# EAGLE board 01-main (EAGLE 9.6.2)
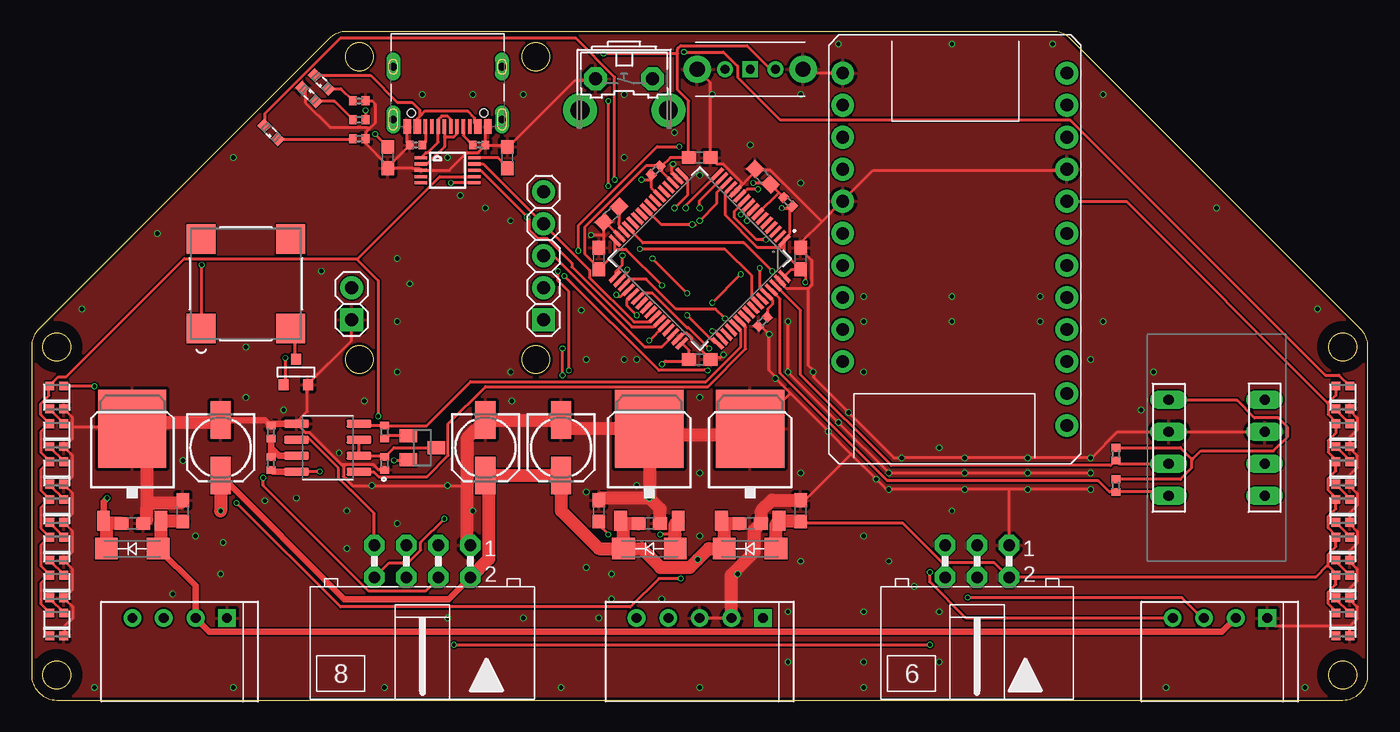
[diagram p0: board, top side]
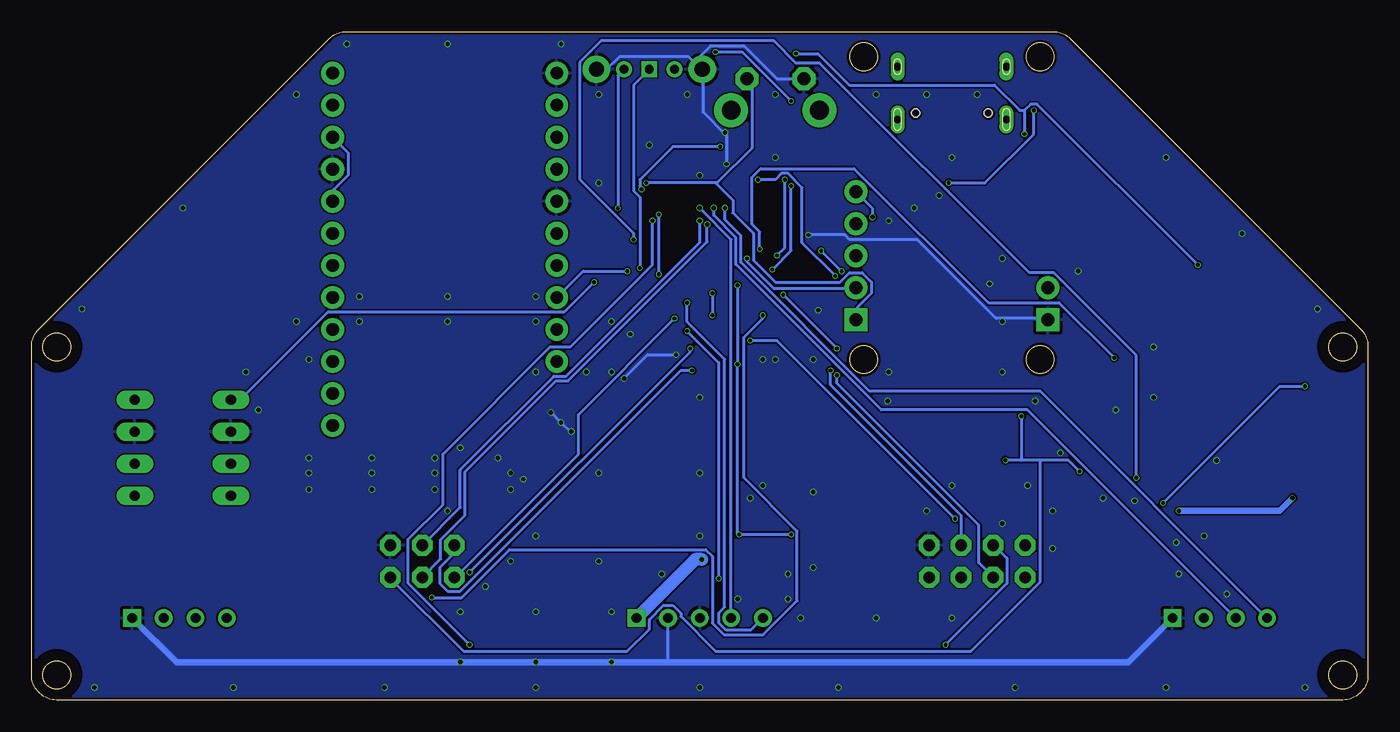
[diagram p1: board, bottom side, seen from below]

Size 106 x 53 mm. Coordinates in mm from the lower left corner, seen from the top.
Outline: 82.41,52.41 arc45 81,53 25,53 arc45 23.59,52.41 0.59,29.41 arc45 0,28 0,2 arc90 2,0 104,0 arc90 106,2 106,28 arc45 105.41,29.41 82.41,52.41
Outline: circle at 104,2 radius 1.1
Outline: circle at 2,28 radius 1.1
Outline: circle at 2,2 radius 1.1
Outline: circle at 104,28 radius 1.1
Outline: circle at 26,27 radius 1.1
Outline: circle at 40,27 radius 1.1
Outline: circle at 40,51 radius 1.1
Outline: circle at 26,51 radius 1.1
Copper layers (1*16): Top 0.035mm / dielectric 1.6mm / Bottom 0.035mm
Design rules "jlcpcb-2layers *": minimum track width 5mil, minimum drill 0.3mm, track to track 5mil, track to pad 5mil, pad to pad 5mil, via to via 5mil, smd to smd 5mil, copper to edge 0.2mm, drill to drill 6mil, minimum pad ring 10mil, minimum via ring 3mil, stop-mask expansion 4mil, vias tented up to drill 15mil, thermal gap 10mil
Net classes: 0 default: width 0.254 mm
tRestrict: area 102,26 to 106,30; area 0,0 to 4,4; area 102,0 to 106,4; area 0,26 to 4,30
bRestrict: area 102,26 to 106,30; area 0,0 to 4,4; area 102,0 to 106,4; area 0,26 to 4,30

## Footprints (pad centres in the part's own frame; a part is rotated, then mirrored left to right if it is on the bottom)
C0603 = smd 1.1 x 1: 1 -0.85,0; 2 0.85,0
153CLV-0505 = smd 3 x 1.6: + 2.2,0; - -2.2,0
ML6L = drill 0.914 octagon: 1 -3.81,-1.27; 2 -3.81,1.27; 3 -1.27,-1.27; 4 -1.27,1.27; 5 1.27,-1.27; 6 1.27,1.27; 7 3.81,-1.27; 8 3.81,1.27
SMA-DO214AC = smd 1.8 x 1.7: A -2.05,0; K 2.05,0
CON_22057045_MOL = drill 0.787 pad 1.143 square: 1 0,0 | drill 0.787 pad 1.143: 2 -2.489,0; 3 -5.004,0; 4 -7.493,0
CON_22057055_MOL = drill 0.787 pad 1.143 square: 1 0,0 | drill 0.787 pad 1.143: 2 -2.489,0; 3 -5.004,0; 4 -7.493,0; 5 -10.008,0
1X02 = drill 1.016 square: 1 -1.27,0 | drill 1.016: 2 1.27,0
1X05 = drill 1.016 square: 1 -5.08,0 | drill 1.016: 2 -2.54,0; 3 0,0; 4 2.54,0; 5 5.08,0
WS2812B_2020 = smd 0.7 x 0.7: 1 0.9,-0.55; 2 0.9,0.55; 3 -0.9,0.55; 4 -0.9,-0.55
SML0603 = smd 0.8 x 0.8: A 0.75,0; C -0.75,0
MLT-8530_JHE = smd 2.311 x 2.311: 1 -3.55,3.55; 2 -3.55,-3.55; 3 3.55,3.55; 4 3.55,-3.55
SOT23 = smd 1 x 1.4: 1 -0.95,-1.1; 2 0.95,-1.1; 3 0,1.1
R0402 = smd 0.6 x 0.7: 1 -0.5,0; 2 0.5,0
MYPARTS_D-PAK_TO252AA = smd 1 x 1.6: 1 -2.28,-4.8; 3 2.28,-4.8 | smd 5.4 x 6.2: 4 0,2.5
B3F-31XX = drill 1.016 octagon: 1 -2.261,-1.245; 2 2.261,-1.245 | drill 1.499 pad 2.159: 3 -3.505,1.245; 4 3.505,1.245
ML6L' = drill 0.914 octagon: 1 -2.54,-1.27; 2 -2.54,1.27; 3 0,-1.27; 4 0,1.27; 5 2.54,-1.27; 6 2.54,1.27
SK-12D11VG3 = drill 0.7 square: 1 0,0 | drill 0.7: 2 -2,0; 3 2,0 | drill 1.2: 4 -4.2,0; 5 4.2,0
SOT-23 = smd 0.787 x 0.889: 1 0.025,-1.016; 2 -0.94,1.016; 3 0.991,1.016
MSOP10 = smd 1 x 0.25: 1 -2.113,1; 2 -2.113,0.5; 3 -2.113,0; 4 -2.113,-0.5; 5 -2.113,-1; 6 2.113,-1; 7 2.113,-0.5; 8 2.113,0; 9 2.113,0.5; 10 2.113,1
LQFP64-10X10MM = smd 1.194 x 0.305: 1 -5.75,3.75; 2 -5.75,3.25; 3 -5.75,2.75; 4 -5.75,2.25; 5 -5.75,1.75; 6 -5.75,1.25; 7 -5.75,0.75; 8 -5.75,0.25; 9 -5.75,-0.25; 10 -5.75,-0.75; 11 -5.75,-1.25; 12 -5.75,-1.75; 13 -5.75,-2.25; 14 -5.75,-2.75; 15 -5.75,-3.25; 16 -5.75,-3.75; 33 5.75,-3.75; 34 5.75,-3.25; 35 5.75,-2.75; 36 5.75,-2.25; 37 5.75,-1.75; 38 5.75,-1.25; 39 5.75,-0.75; 40 5.75,-0.25; 41 5.75,0.25; 42 5.75,0.75; 43 5.75,1.25; 44 5.75,1.75; 45 5.75,2.25; 46 5.75,2.75; 47 5.75,3.25; 48 5.75,3.75 | smd 0.305 x 1.194: 17 -3.75,-5.75; 18 -3.25,-5.75; 19 -2.75,-5.75; 20 -2.25,-5.75; 21 -1.75,-5.75; 22 -1.25,-5.75; 23 -0.75,-5.75; 24 -0.25,-5.75; 25 0.25,-5.75; 26 0.75,-5.75; 27 1.25,-5.75; 28 1.75,-5.75; 29 2.25,-5.75; 30 2.75,-5.75; 31 3.25,-5.75; 32 3.75,-5.75; 49 3.75,5.75; 50 3.25,5.75; 51 2.75,5.75; 52 2.25,5.75; 53 1.75,5.75; 54 1.25,5.75; 55 0.75,5.75; 56 0.25,5.75; 57 -0.25,5.75; 58 -0.75,5.75; 59 -1.25,5.75; 60 -1.75,5.75; 61 -2.25,5.75; 62 -2.75,5.75; 63 -3.25,5.75; 64 -3.75,5.75
SUNA_LIB_M5STAMPC3UMATE = drill 1: 3V3P 10.16,10.16; 5V1P -7.62,-2.54; 5V2P -7.62,-7.62; 5V3P 10.16,-10.16; ENP 10.16,2.54; G0P -7.62,-12.7; G1P -7.62,-10.16; G3P -7.62,15.24; G4P -7.62,12.7; G5P -7.62,10.16; G6P -7.62,7.62; G7P -7.62,5.08; G8P -7.62,2.54; G9P 10.16,0; G10 -7.62,0; G18P 10.16,-5.08; G19P 10.16,-7.62; G20P 10.16,5.08; G21P 10.16,7.62; GND2P -7.62,-5.08; GND3P 10.16,-12.7; GND4P 10.16,-2.54
SOCKET-08 = drill 0.813 long: 1 -3.81,-3.81; 2 -1.27,-3.81; 3 1.27,-3.81; 4 3.81,-3.81; 5 3.81,3.81; 6 1.27,3.81; 7 -1.27,3.81; 8 -3.81,3.81
SOIC127P600X175-8N = smd 1.97 x 0.59: 1 -2.475,1.905; 2 -2.475,0.635; 3 -2.475,-0.635; 4 -2.475,-1.905; 5 2.475,-1.905; 6 2.475,-0.635; 7 2.475,0.635; 8 2.475,1.905
USB_C_CUSB31-CFM2AX-01-X = smd 0.575 x 1.15: A1B12 -3.2,3.545; A4B9 -2.4,3.545; B1A12 3.2,3.545; B4A9 2.4,3.545 | smd 0.275 x 1.15: A5 -1.25,3.545; A6 -0.25,3.545; A7 0.25,3.545; A8 1.25,3.545; B5 1.75,3.545; B6 0.75,3.545; B7 -0.75,3.545; B8 -1.75,3.545 | drill 0.6 pad 1 long: M1 -4.32,2.97; M2 4.32,2.97; M3 -4.32,-1.21; M4 4.32,-1.21 | hole 0.65: 2.89,2.47; -2.89,2.47

## Placement (x,y rotation side)
C1  4.7µ  [C0603]  46,38.5 225 top
C2  0.1µ  [C0603]  53,43 0 top
C3  0.1µ  [C0603]  45,35 90 top
C4  0.1µ  [C0603]  61,35 90 top
C5  0.1µ  [C0603]  53,27 0 top
C6  0.1µ  [C0603]  28.25,43 270 top
C7  0.1µ  [C0603]  45,15 90 top
C8  1µ  [C0603]  57,14 0 top
C9  100μ  [153CLV-0505]  36,20 270 top
C11  0.1µ  [C0603]  61,15 90 top
C13  100μ  [153CLV-0505]  42,20 270 top
C14  0.1µ  [C0603]  37.75,43 90 top
C16  0.1µ  [C0603]  58,41.5 135 top
C17  1µ  [C0603]  49,14 0 top
C18  0.1µ  [C0603]  12,15 90 top
C19  1µ  [C0603]  8,14 0 top
C20  100μ  [153CLV-0505]  15,20 270 top
CN1  ML8  [ML6L]  31,11 180 top
D1  1N4001  [SMA-DO214AC]  49,12 180 top
D2  1N4001  [SMA-DO214AC]  57,12 180 top
D4  1N4001  [SMA-DO214AC]  8,12 180 top
J1  22057045  [CON_22057045_MOL]  98,6.5 0 top
J8  22057045  [CON_22057045_MOL]  15.5,6.5 0 top
J14  22057055  [CON_22057055_MOL]  58,6.5 0 top
JP1  [1X02]  25.38,31.41 90 top
JP2  [1X05]  40.62,35.22 90 top
LED1  WS2812B_2020  [WS2812B_2020]  2,24 270 top
LED2  WS2812B_2020  [WS2812B_2020]  2,21 270 top
LED3  WS2812B_2020  [WS2812B_2020]  2,18 270 top
LED4  WS2812B_2020  [WS2812B_2020]  2,15 270 top
LED5  WS2812B_2020  [WS2812B_2020]  2,12 270 top
LED6  WS2812B_2020  [WS2812B_2020]  2,9 270 top
LED7  WS2812B_2020  [WS2812B_2020]  2,6 270 top
LED8  WS2812B_2020  [WS2812B_2020]  104,24 270 top
LED9  WS2812B_2020  [WS2812B_2020]  104,21 270 top
LED10  WS2812B_2020  [WS2812B_2020]  104,18 270 top
LED11  WS2812B_2020  [WS2812B_2020]  104,15 270 top
LED12  WS2812B_2020  [WS2812B_2020]  104,12 270 top
LED13  WS2812B_2020  [WS2812B_2020]  104,9 270 top
LED14  WS2812B_2020  [WS2812B_2020]  104,6 270 top
LED15  BLUE  [SML0603]  23,49 135 top
LED17  WHITE  [SML0603]  19,45 135 top
LED18  WHITE  [SML0603]  22,48 315 top
LS1  MLT-8530  [MLT-8530_JHE]  17,33 90 top
Q1  C1015  [SOT23]  31,20 270 top
R1  5k1  [R0402]  35.5,44 0 top
R2  5k1  [R0402]  30.5,44 180 top
R3  270  [R0402]  26,47.5 180 top
R4  10k  [R0402]  49.5,42 225 top
R10  270  [R0402]  26,46 0 top
R12  10k  [R0402]  86,19.5 270 top
R13  10k  [R0402]  86,17 270 top
R14  20k  [R0402]  28,18.75 270 top
R15  2k2  [R0402]  19,18.75 90 top
R16  2k2  [R0402]  19,21.25 90 top
R17  7.5k  [R0402]  28,21.25 90 top
R30  10k  [R0402]  60,39.5 135 top
R31  10k  [R0402]  58,30 225 top
R32  270  [R0402]  26,44.5 180 top
REG1  REG-3V3  [MYPARTS_D-PAK_TO252AA]  49,19 0 top
REG2  REG-5V  [MYPARTS_D-PAK_TO252AA]  57,19 0 top
REG3  REG-5V  [MYPARTS_D-PAK_TO252AA]  8,19 0 top
S1  [B3F-31XX]  47,48 180 top
SV1  [ML6L']  75,11 180 top
SW1  SK-12D11VG3  [SK-12D11VG3]  57,50 0 top
T1  BSS138  [SOT-23]  21,26 180 top
U1  CH340ESMD  [MSOP10]  33,42 0 top
U2  STM32F446RET6  [LQFP64-10X10MM]  53,35 225 top
U3  SUNA_LIB_M5STAMP_C3U_MATE  [SUNA_LIB_M5STAMPC3UMATE]  74.5,37 180 top
U4  [SOCKET-08]  94,20 270 top
U5  MAX485ESA+T  [SOIC127P600X175-8N]  23.5,20 180 top
X2  usb-c  [USB_C_CUSB31-CFM2AX-01-X]  33,49 180 top

## Library data of the parts
C1-C9 C11 C13 C14 C16-C20 = rcl; SPICEPREFIX: C
CN1 = ML8
D1 D2 D4 = diode
J1 J8 = con-molex-5268; COPYRIGHT: Copyright (C) 2022 Ultra Librarian. All rights reserved.; MANUFACTURER_PART_NUMBER: 22057045; MFR_NAME: Molex Connector Corporation
J14 = con-molex-5268; COPYRIGHT: Copyright (C) 2022 Ultra Librarian. All rights reserved.; MANUFACTURER_PART_NUMBER: 22057055; MFR_NAME: Molex Connector Corporation
JP1 JP2 = pinhead-compact
LED1-LED14 X2 = microbuilder
LED15 LED17 LED18 = led
LS1 = MLT-8530; COPYRIGHT: Copyright (C) 2022 Ultra Librarian. All rights reserved.; MANUFACTURER_PART_NUMBER: MLT-8530; MFR_NAME: Jiangsu Huaneng Elec
Q1 = transistor-pnp
R1-R4 R10 R12-R17 R30-R32 = rcl; SPICEPREFIX: R
REG1-REG3 = #001-line
S1 = switch-omron; MPN: B3F-3100; OC_FARNELL: 959704; OC_NEWARK: 36M3582
SV1 = con-ml; OC_FARNELL: unknown; OC_NEWARK: unknown
SW1 = Slide Switch
T1 = zetex; OC_FARNELL: unknown; OC_NEWARK: unknown
U1 = CH340E
U2 = F446RE; COPYRIGHT: Copyright (C) 2022 Ultra Librarian. All rights reserved.; MANUFACTURER_PART_NUMBER: STM32F446RET6; MFR_NAME: STMicroelectronics
U3 = M5StampC3-pin
U4 = BNO055
U5 = MAX485; AVAILABILITY: In Stock; DESCRIPTION: 1/1 Transceiver Half RS422, RS485 8-SOIC; MF: Maxim Integrated; MP: MAX485ESA; PACKAGE: SOIC-8 Maxim; PRICE: None; PURCHASE-URL: https://pricing.snapeda.com/search/part/MAX485ESA/?ref=eda

## Nets
!RE: Q1.3 R14.1 U5.2 U5.3
+3V3: C2.1 C3.1 C4.1 C5.1 C6.1 C7.1 D1.A LS1.1 R4.1 R12.1 R13.1 R30.1 REG1.3 SW1.3 U2.1 U2.13 U2.19 U2.32 U2.48 U2.64 U4.1
+5V: C11.1 D2.A LED1.4 LED2.4 LED3.4 LED4.4 LED5.4 LED6.4 LED7.4 LED8.4 LED9.4 LED10.4 LED11.4 LED12.4 LED13.4 LED14.4 Q1.2 R15.1 REG2.3 SV1.2 U1.7 U3.5V1P U3.5V2P U5.8
BOOT0: R31.1 SW1.1 U2.60
CTS: U1.5
D+: U1.1 X2.A6 X2.B6
D-: U1.2 X2.A7 X2.B7
GND: C1.2 C2.2 C3.2 C4.2 C5.2 C6.2 C7.2 C8.2 C9.- C11.2 C13.- C14.2 C16.2 C17.2 C18.2 C19.2 C20.- CN1.1 J1.1 J8.1 J14.2 J14.3 JP1.1 LED1.2 LED2.2 LED3.2 LED4.2 LED5.2 LED6.2 LED7.2 LED8.2 LED9.2 LED10.2 LED11.2 LED12.2 LED13.2 LED14.2 LED18.C R1.2 R2.2 R3.1 R14.2 R16.2 R31.2 R32.1 REG1.4 REG2.4 REG3.4 S1.2 SV1.1 SW1.4 SW1.5 T1.2 U1.3 U2.12 U2.18 U2.31 U2.47 U2.63 U3.GND2P U3.GND3P U3.GND4P U4.2 U4.7 U5.5 X2.A1B12 X2.B1A12
LED-FLOOR: CN1.6 U2.36
LED-L: LED1.3 U2.50
LED-R: LED8.3 U2.34
LED-TOP: J14.5 U2.9
LED-UI: SV1.6 U2.35
LED-WHITE: LED17.A U2.33
LOADCELL-L: CN1.4 U2.10
LOADCELL-R: CN1.3 U2.11
MIRROR: CN1.8 U2.44
N$1: LED1.1 LED2.3
N$2: LED2.1 LED3.3
N$3: LED3.1 LED4.3
N$4: LED4.1 LED5.3
N$5: LED5.1 LED6.3
N$6: LED6.1 LED7.3
N$7: LED8.1 LED9.3
N$8: C14.1 U1.10
N$9: LED9.1 LED10.3
N$10: LED10.1 LED11.3
N$11: LED11.1 LED12.3
N$12: LED12.1 LED13.3
N$13: LED13.1 LED14.3
N$14: R1.1 X2.A5
N$15: R2.1 X2.B5
N$16: LED15.C R3.2
N$17: LS1.2 T1.1
N$18: C1.1 U2.30
N$22: R10.2 U1.6
N$23: LED18.A R10.1
N$27: Q1.1 R17.1
N$28: R15.2 R16.1 U5.7
N$32: LED17.C R32.2
N$49: LED15.A X2.A4B9 X2.B4A9
NRST: C16.1 JP2.1 R30.2 S1.1 U2.7
RTS: U1.4
SCL: R13.2 U2.61 U4.4
SDA: R12.2 U2.62 U4.3
SERVO-SIG: CN1.7 U5.6
SIG-FLOOR: CN1.5 U2.8
SPK: T1.3 U2.58
SWCLK: JP2.2 U2.49
SWDIO: JP2.3 U2.46
SWO: U2.55
TOGGLE: R4.2 SV1.5 U2.22
UART1-RX: JP2.5 U1.8 U2.43
UART1-TX: JP2.4 U1.9 U2.42
UART2-RX: J8.4 U2.17
UART2-TX: J8.3 U2.16
UART3-RX: SV1.4 U2.25
UART3-TX: U2.29 U3.G20P
UART4-RX: J14.4 U2.15
UART4-TX: SV1.3 U2.14
UART5-RX: U2.54 U5.1
UART5-TX: R17.2 U2.53 U5.4
UART6-RX: J1.4 U2.38
UART6-TX: J1.3 U2.37
VCC: C18.1 D4.A J1.2 J8.2 REG3.3
VDD: C8.1 C9.+ C13.+ C17.1 C19.1 C20.+ CN1.2 D1.K D2.K D4.K J14.1 REG1.1 REG2.1 REG3.1
VOUT: U4.8

## Tracks (layer width: path | path; a pad name or v marks a point on that pad's centre or on a via)
!RE
  Top 0.254: U5.3 U5.2 27.89,19.36 R14.1 28.75,20 Q1.3
+3V3  (via drill 0.3)
  Top 0.254: U2.19 49.95,41.94 49.95,42.26 49.94,42.27 | 49.94,42.27 R4.1 49.75,42.38 48.75,42.38 43.88,37.5 43.88,35.38 45,34.25 C3.1 46.28,35.43 46.28,35.75 | 49.94,42.27 50.67,43 C2.1 52.12,43.12 52.12,47.5 51.25,48.38 51.25,51.25 | U2.64 60.28,34.15 C4.1 | C4.1 59.72,35.43 59.72,35.88 | 59.72,35.88 U2.1 59.72,36.55 60.15,36.98 60.15,38.94 R30.1 60.12,39 v59.5,39 | 46.28,35.75 U2.32 | U2.48 52.15,27.72 C5.1 52.12,26.88 50.25,26.88 v50,26.62 | v27.25,44.88 28.25,43.88 C6.1 | v13.5,34.5 13.5,29.5 LS1.1 | R13.1 91.12,17.5 92,18.38 92,19.12 | 92,19.12 91.12,20 R12.1 | U4.1 90.25,23.75 95.62,23.75 97,22.38 98.88,22.38 99.62,21.62 99.62,20.88 98.5,19.75 92.75,19.75 92.12,19.12 92,19.12 | C7.1 45,13.88 v45.75,13.12 | 51.05,13.12 v49.88,13.12 | SW1.3 58.62,50 56.75,51.88 51.5,51.88 51.25,51.62 51.25,51.25 | v50,32.88 47.12,35.75 46.28,35.75 | v61.38,33.12 61.38,33.88 61.12,34.12 C4.1 | 51.25,51.25 v45.38,51.25 | 59.72,35.88 57.59,35.88 55.05,38.42 55.05,40.23 U2.13
  Top 1.016: D1.A 51.05,13.12 51.05,13.97 REG1.3
  Bottom 0.254: 27.25,46.75 v27.25,44.88 | 27.25,46.75 26.75,47.25 26.25,47.25 v13.5,34.5 | v45.75,13.12 v49.88,13.12 50,13.12 v50,26.62 v50,32.88 | v59.5,39 59.5,49.5 SW1.3 | v61.38,33.12 63.75,30.75 82.5,30.75 89.38,23.88 90.12,23.88 U4.1 | 27.25,46.75 27.62,46.75 29.62,48.75 41.12,48.75 43.62,51.25 v45.38,51.25
+5V  (via drill 0.3)
  Top 0.254: 102.85,23.55 102.85,22.64 103.45,22.04 LED9.4 103.45,21.16 102.85,20.55 102.85,19.64 103.45,19.04 LED10.4 103.45,18.16 102.85,17.55 102.85,16.64 103.45,16.04 LED11.4 103.45,15.16 102.85,14.55 102.85,13.64 103.45,13.04 LED12.4 103.45,12.16 102.85,11.55 102.85,10.64 | LED8.4 103.45,24.16 102.85,23.55 | LED14.4 103.45,7.04 102.85,7.64 102.85,8.55 103.45,9.16 LED13.4 103.45,10.04 102.85,10.64 | v28.75,19 29.88,19 Q1.2 | v22.88,18.12 21.25,18.12 U5.8 | LED7.4 1.38,7 0.75,7.62 0.75,9.25 1.38,9.88 LED6.4 1.38,10 0.75,10.62 0.75,12.25 1.38,12.88 LED5.4 1.38,13 0.75,13.62 0.75,15.25 1.38,15.88 LED4.4 1.38,16 0.75,16.62 0.75,18.25 1.38,18.88 LED3.4 1.38,19 0.75,19.62 0.75,21.25 1.38,21.88 LED2.4 1.38,22 0.75,22.62 0.75,23.5 1.38,24.12 1.38,24.88 LED1.4 1.5,25 2.12,25.62 2.75,25.62 12.12,35 25.88,35 | U1.7 32.38,41.5 25.88,35 | v27.5,22.5 27.5,33.25 25.88,34.88 25.88,35 | C11.1 61.5,14 69.12,14 72.25,10.88 76.38,10.88 77.5,9.75 SV1.2 77.62,9.75 101.88,9.75 102.75,10.62 102.85,10.64 | U3.5V1P 82.12,39.5 86.88,39.5 102.75,23.62 102.85,23.55
  Top 0.508: U5.8 19.16,18.09 R15.1
  Top 1.016: D2.A 59.05,13.97 REG2.3 60.95,14.2 C11.1
  Bottom 0.254: 26,19 23.75,19 v22.88,18.12 | 26,19 27.5,19 | 27.5,19 v28.75,19 | v27.5,22.5 27.5,19 | U3.5V2P 80.88,43.38 80.88,41.62 82,40.5 82,39.62 U3.5V1P | 26,19 26,9.38 31.5,3.88 51.75,3.88 54.5,6.62 54.5,6.88 55.12,7.5 55.88,7.5 57,6.38 57,5.62 58.75,3.88 71.75,3.88 77.5,9.62 SV1.2
BOOT0  (via drill 0.3)
  Top 0.254: R31.1 58.38,30.38 58.38,31 58.75,31.38 58.75,31.75 58.38,32.12 U2.60 58.25,32.25 57.75,32.75 v57.75,34.25
  Bottom 0.254: v57.75,34.25 57.75,39.88 58.25,40.38 58.25,48.75 SW1.1
D+
  Top 0.254: U1.1 31.28,43.4 31.41,43.4 32.25,44.24 X2.B6 32.25,46.03 32.51,46.28 32.99,46.28 33.25,46.03 X2.A6
D-
  Top 0.254: X2.A7 32.75,44.63 | 32.75,44.63 32.75,43.88 31.37,42.5 31,42.5 | 31,42.5 U1.2 | X2.B7 33.75,44.88 33.49,44.63 32.75,44.63 | U1.2 31,42.5
GND  (via drill 0.3, 0.35)
  Top 0.254: U4.7 U4.2 90.12,21.25 86.12,21.25 84.12,19.25 v84,19.2 v79,19.2 v74,19.2 v69,19.2 68.4,19.2 v64.8,22.8 62,25.6 v62,26 62,26.12 61.62,26.5 61.62,32.62 | LED14.2 104.55,5.84 | 104.55,5.84 105.15,6.45 105.15,7.36 104.55,7.96 LED13.2 104.55,8.84 105.15,9.45 105.15,10.36 104.55,10.96 LED12.2 104.55,11.84 105.15,12.45 105.15,13.36 104.55,13.96 LED11.2 104.55,14.84 105.15,15.45 105.15,16.36 104.55,16.96 LED10.2 104.55,17.84 105.15,18.45 105.15,19.36 104.55,19.96 LED9.2 104.55,20.84 105.15,21.45 105.15,22.36 104.55,22.96 LED8.2 | X2.B1A12 29.8,44.2 R2.2 28.25,42.25 C6.2 | C6.2 30.25,42.15 30.28,42.12 30.77,42.12 U1.3 33.13,42 34.52,43.4 35.41,43.4 35.55,43.55 R1.2 | R3.1 27.01,47.5 27.25,47.26 27.25,45.74 26.75,45.24 | 26.75,45.24 26.5,44.99 R32.1 26.5,44.12 28.25,42.38 C6.2 | 26.75,45.24 26.6,45.4 23.68,45.4 21.71,47.36 21.71,48.29 LED18.C | R1.2 36,45.26 X2.A1B12 | R1.2 37.6,44 C14.2 37.85,43.85 43.12,49.12 44.62,49.12 S1.2 | v84,18 v79,18 v74,18 v68,18 v64,22 v60,26 v60,30 | 77.5,16.7 v79,16.7 v84,16.7 | 77.5,16.7 v74,16.7 v68,16.7 67.8,16.7 v67,17.5 65,19.5 | 65,19.5 v63.2,21.3 60.19,24.31 | 60.19,24.31 v59,25.5 59,25.62 58.5,26.12 v58.5,29 57.75,29.75 R31.2 | R14.2 27.53,18.25 27.14,18.64 24.61,18.64 | 24.61,18.64 22.07,21.18 21.75,21.18 U5.5 21.12,22.12 21.88,22.88 21.88,24.88 T1.2 21.88,25 25.38,28.5 25.38,30.12 JP1.1 | 24.61,18.64 24.74,18.52 24.74,17.74 25.47,17 34.56,17 | C3.2 45.4,36.25 45.4,36.88 | 45.4,36.88 C1.2 45.51,37.9 U2.31 | U2.47 51.37,28.64 51.8,29.07 52.01,29.07 52.37,28.7 52.37,28.48 C5.2 53.88,27.12 54.62,27.12 v54.88,27.38
  Top 0.254: U3.GND3P 64.25,49.75 61.5,49.75 61.25,50 SW1.5 | v50.88,42.5 50.75,42.38 50.75,41.75 51.12,41.38 U2.18 | 62.69,37.94 64.25,39.5 U3.GND4P 64.38,39.62 66.75,42 82,42 U3.GND2P | 62.69,37.94 61,36.25 C4.2 61,35.75 61.88,34.88 61.88,32.88 61.62,32.62 | 61.62,32.62 59.88,32.62 59.38,33.12 U2.63 | 62.69,37.94 58.62,42 57.5,42 C16.2 57.4,41.87 U2.12 55.83,40.44 56.26,40.87 56.26,41.08 54.83,42.5 54.35,42.5 C2.2 53.85,48.95 SW1.4 | v44.38,36.88 45.4,36.88 | LED7.2 2.62,5.12 2.62,5.88 3.25,6.5 3.25,7.38 2.62,8 LED6.2 2.62,8.12 3.25,8.75 3.25,10.38 2.62,11 LED5.2 2.62,11.12 3.25,11.75 3.25,13.38 2.62,14 LED4.2 2.62,14.12 3.25,14.75 3.25,16.38 2.62,17 LED3.2 2.62,17.12 3.25,17.75 3.25,19.38 2.62,20 LED2.2 2.62,20.12 3.25,20.75 3.25,21.62 | 3.25,21.62 3.25,22.38 2.62,23 LED1.2 | 9,22 8.5,21.88 8.38,21.75 REG3.4 7.5,21.62 3.25,21.62 | J14.2 J14.3 | 77.5,16.7 77.5,12.38 SV1.1 | 65,19.5 61.5,16 C11.2 | 60.19,24.31 57.5,21.62 REG2.4 | J1.1 98.62,5.88 104.5,5.88 104.55,5.84
  Top 0.508: U5.5 19.16,21.91 R16.2 18.55,22.2 C20.-
  Top 1.016: C17.2 49.85,15.15 v49,16 | v49,16 45.15,16 C7.2 | 49,21 REG1.4 42.7,21.5 C13.- C9.- 34.56,20.77 34.56,17 34.56,12.52 CN1.1 | 49,21 v49,16 | C11.2 58.73,15.85 57.91,15.03 57.91,14.06 C8.2 57.34,13.48 57.34,11.74 55.51,9.91 J14.2 | REG2.4 56.5,21 49,21 | 9.15,15.26 9.52,15.63 11.78,15.63 C18.2 | C19.2 9.15,14.29 9.15,15.26 | REG3.4 9.15,20.36 9.15,15.26 | C20.- 14.8,22 9,22
  Bottom 0.254: v50.88,42.5 50.88,44.75 52.75,46.62 52.75,50 SW1.4 | SW1.5 60.38,50 59.38,51 53.88,51 52.88,50 SW1.4 | S1.2 46.88,49.25 49.5,51.88 52.12,51.88 53.38,50.62 SW1.4 | v44.38,36.88 41.5,36.88 41.12,36.5 35.75,36.5 29.5,30.25 25.5,30.25 JP1.1 | 55.5,3 J14.2 | v63.2,21.3 63.25,21.25 v64,22 v64.8,22.8 | v54.88,27.38 57.12,27.38 v59,25.5
  Bottom 0.508: J8.1 19,3 55.5,3 94.5,3 J1.1
  other vias: 53,1 5,1 101,1 78,1 28,1 4,31 16,43 10,37 102,31 85,48 94,39 64,52 81,52 73,52 72,7 60,7 56,10 61,11 68,11 70,9 66,7 66,13 61,18 53,24 53,13 53,18 66,26 72,20 73,15 31,48 35,48 39,48 33,43 27,17 33,17 29,14 38.1,23.7 26.4,23.7 11.2,8.4 15.2,12.5 18.5,15.8 47,27 48,27 48,17 35,15 45,6.5 33,6.5 39,6.5 44,10.5 44,16.5 60,3 66,3 72,3 88,23 84,27 66,30 80,30 73,30 73,32 66,32 80,32 61,41 61,48 57,44 54,48 53,41.6 89,26 85,30 90,1 66,1 42,1 16,1 15,10 21,16 25,15 25,12 12,19 13,13 17,24 17,28 23,34 29,35 34,40 36,39 30,33 29,30 38,38 29,26 38,26 43.6,30.9 20,23 47,48 47,43 51,45 24.4,19.6 46,10 46,8 50,8 44,27
  pour Top: -1,-1 -1,54 92,54 107,54 107,-1
  pour Bottom: -1,-1 107,-1 107,54 -1,54
LED-FLOOR  (via drill 0.3)
  Top 0.254: v46.38,32.12 46.5,32 46.75,32 47.25,32.5 U2.36 | v42.12,25.75 v42.12,27.88
  Bottom 0.254: v42.12,27.88 v46.38,32.12 | v42.12,25.75 42.12,25.12 30.88,13.88 30.88,10.88 CN1.6
LED-L  (via drill 0.3)
  Top 0.254: v5,24.88 2.62,24.88 LED1.3 | v16.25,15.62 24.5,7.38 47.5,7.38 49.75,9.62 v51.5,9.62 | v54,29.25 54.25,29.25 54.75,28.75 U2.50
  Bottom 0.254: v5,24.88 7,24.88 v16.25,15.62 | v51.5,9.62 51.5,26.75 v54,29.25
LED-R  (via drill 0.3)
  Top 0.254: v45.75,40.75 v45.75,47.5 | v47.25,34.12 47.25,33.88 46.62,33.25 U2.34 | v51.75,51.38 54.88,51.38 56,50.25 56,49.38 59.38,46 82.38,46 102.62,25.75 103.7,25.75 LED8.3
  Bottom 0.254: v51.75,51.38 49.62,51.38 v45.75,47.5 | v45.75,40.75 45.75,35.62 v47.25,34.12
LED-TOP  (via drill 0.3)
  Top 0.254: v56.25,38.5 56.88,39.12 U2.9 | v54,31.5 v56.25,33.75
  Bottom 0.254: v56.25,33.75 v56.25,38.5 | v54,31.5 54,30 51.02,27.02 51.02,7.36 51.47,6.91 51.47,6.1 50.91,5.54 48.96,5.54 J14.5
LED-UI  (via drill 0.3)
  Top 0.254: v55,30.25 54.25,31 51.12,31 48.75,33.38 47.38,33.38 47,33 U2.35
  Bottom 0.254: v55,30.25 62.62,22.62 62.62,19.5 72.38,9.75 SV1.6
LED-WHITE  (via drill 0.3)
  Top 0.254: v46.88,35.25 46.88,34.5 46.38,34 46.38,33.62 U2.33 | LED17.A 18.5,45.56 18.5,46.49 24.47,52.45 43.18,52.45 46.25,49.39 v46.25,41.25
  Bottom 0.254: v46.25,41.25 46.25,35.88 v46.88,35.25
LOADCELL-L  (via drill 0.3)
  Top 0.254: v58.25,36.5 57.5,36.5 55.75,38.25 55.75,38.75 56.5,39.5 U2.10 | v18.38,17.62 18.38,17 26.75,8.62 31.25,8.62 32.25,9.62 CN1.4
  Bottom 0.254: v58.25,36.5 58.25,37 62.53,41.28 62.53,50.55 60.83,52.26 47.13,52.26 45.38,50.5 43.5,50.5 26.88,33.88 24.92,33.88 18.38,27.33 v18.38,17.62
LOADCELL-R  (via drill 0.3)
  Top 0.254: v57.62,40.5 56.75,40.5 56.25,40 U2.11 | v51.38,43.88 49.62,43.88 43.38,37.62 v43.38,35.62 | v41.75,34 41.75,33.25 42.62,32.38 v42.62,26.12
  Bottom 0.254: v57.62,40.5 57.62,40.62 57.75,40.75 57.75,41.25 55.12,43.88 v51.38,43.88 | v41.75,34 v43.38,35.62 | v42.62,26.12 42.62,25 32.25,14.62 32.25,12.38 CN1.3
MIRROR  (via drill 0.3)
  Top 0.254: v49,28.5 50.12,29.62 U2.44 | v32.75,14.38 30.88,12.5 30.88,11.88 29.88,10.88 28.38,10.88 27.25,9.75 CN1.8
  Bottom 0.254: v49,28.5 46.88,28.5 v32.75,14.38
N$1
  Top 0.254: LED2.3 2.5,22 1.5,23 LED1.1
N$2
  Top 0.254: LED3.3 2.5,19 1.5,20 LED2.1
N$3
  Top 0.254: LED4.3 2.5,16 1.5,17 LED3.1
N$4
  Top 0.254: LED5.3 2.5,13 1.5,14 LED4.1
N$5
  Top 0.254: LED6.3 2.5,10 1.5,11 LED5.1
N$6
  Top 0.254: LED7.3 2.5,7 1.5,8 LED6.1
N$7
  Top 0.254: LED9.3 103.45,23 LED8.1
N$8
  Top 0.254: U1.10 37,43 37.75,42.25 C14.1
N$9
  Top 0.254: LED9.1 104.55,19 LED10.3
N$10
  Top 0.254: LED10.1 104.55,16 LED11.3
N$11
  Top 0.254: LED11.1 104.55,13 LED12.3
N$12
  Top 0.254: LED13.3 103.45,11 LED12.1
N$13
  Top 0.254: LED14.3 103.45,8 LED13.1
N$14
  Top 0.254: X2.A5 34.25,44.75 R1.1
N$15
  Top 0.254: X2.B5 31.25,44.25 R2.1
N$16
  Top 0.254: LED15.C 24.53,48.47 R3.2
N$17
  Top 0.254: LS1.2 20.88,29.12 20.88,27.12 T1.1
N$18
  Top 0.254: U2.30 46.99,37.25 46.56,37.68 46.56,37.89 46.6,37.94 C1.1
N$22  (via drill 0.3)
  Top 0.254: v26.5,46.75 R10.2 | U1.6 v33.25,41
  Bottom 0.254: v26.5,46.75 26.5,44.88 30.38,41 v33.25,41
N$23
  Top 0.254: R10.1 24.03,47.47 LED18.A
N$27
  Top 0.254: Q1.1 28.2,20.95 R17.1
N$28
  Top 0.508: R16.1 19,20 | 19,20 R15.2 | U5.7 19.63,19.36 19,20
N$32
  Top 0.254: LED17.C 25.47,44.47 R32.2
N$49
  Top 0.254: 30.76,46.26 30.76,46.8 30.17,47.39 29.02,47.39 26.88,49.53 LED15.A | 30.76,46.26 30.6,46.1 X2.B4A9 | X2.A4B9 35.14,45.71 35.14,46.13 34.61,46.66 31.17,46.66 30.76,46.26
NRST  (via drill 0.3)
  Top 0.254: 59.25,40.25 C16.1 58.5,41 v57.25,41 | 59.25,40.25 R30.2 | 59.25,40.25 59.25,40.19 U2.7
  Bottom 0.254: 51.62,41 v57.25,41 | 51.62,41 48.88,43.75 48.88,48.75 49.25,49.12 S1.1 | JP2.1 40.5,30.25 40.5,31.12 39.38,32.25 39.38,33.12 40.12,33.88 41.12,33.88 41.88,33.12 47,33.12 48.75,34.88 48.75,37 50.38,38.62 50.38,39.62 51.62,40.88 51.62,41
SCL
  Top 0.254: U4.4 89.88,16.5 R13.2 85.5,16.5 84.6,17.4 67.89,17.4 59.37,25.92 59.37,31.81 U2.61
SDA
  Top 0.254: U4.3 86.27,18.73 R12.2 85.6,18.6 68.19,18.6 61,25.79 61,30.89 U2.62
SERVO-SIG
  Top 0.254: CN1.7 27.19,14.8 25.37,16.62 25.32,16.62 24.36,17.58 24.36,18.36 21.92,20.8 | 21.92,20.8 21.91,20.8 | U5.6 21.12,20.75 21.88,20.75 21.92,20.8
SIG-FLOOR  (via drill 0.3)
  Top 0.254: v56.75,38 56.75,38.38 57.25,38.88 U2.8 | v33.5,4.38 v71.25,4.38
  Bottom 0.254: v56.75,38 56.75,34.5 63.25,28 64.88,28 73.38,19.5 73.38,15.5 76.12,12.75 76.12,9.25 v71.25,4.38 | v33.5,4.38 28.62,9.25 28.62,11.25 29.62,12.25 CN1.5
SPK  (via drill 0.3)
  Top 0.254: v20.12,27.12 20.12,25 T1.3 | v48.25,35.75 55,35.75 57.12,33.62 57.12,31.88 57.5,31.5 U2.58
  Bottom 0.254: v20.12,27.12 24.5,31.5 30.12,31.5 40.76,42.13 48.17,42.13 48.86,41.45 48.86,37.73 48.25,37.12 v48.25,35.75
SWCLK  (via drill 0.3)
  Top 0.254: v52,30.5 54.12,28.38 54.38,28.38 U2.49 | v49.25,35 v52,32.25
  Bottom 0.254: v52,32.25 v52,30.5 | v49.25,35 49.25,34.75 47.12,32.62 40.62,32.62 JP2.2
SWDIO
  Top 0.254: U2.46 50.88,28.88 50,28 48.62,28 41.5,35.12 40.62,35.12 JP2.3
TOGGLE  (via drill 0.3)
  Top 0.254: U2.22 49.15,40.62 R4.2 49.12,41.25 v48.38,41.25 | v42.25,33.62 49.75,26.12 v53.62,26.12
  Bottom 0.254: v48.38,41.25 47,41.25 46.5,41.75 46,41.75 44.88,40.62 44.88,36.25 v42.25,33.62 | v53.62,26.12 54.5,26.12 72,8.62 73,8.62 73.62,9.25 73.62,10.5 72.5,11.62 72.5,12.25 SV1.5
UART1-RX  (via drill 0.35)
  Top 0.254: U2.43 | U1.8 35.6,42 v39.3,38.3 39.45,38.15 39.45,37.28 40.14,36.59 40.9,36.59 42.87,34.63 42.87,34.34 47.61,29.59 49.36,29.59 U2.43
  Bottom 0.254: JP2.5 39.3,38.98 v39.3,38.3
UART1-TX
  Top 0.254: U2.42 | U2.42 49.03,29.97 47.77,29.97 44.25,33.49 44.25,34.07 40.59,37.72 | 40.59,37.72 35.81,42.5 U1.9 | JP2.4 40.59,37.72
UART2-RX  (via drill 0.35)
  Top 0.254: U2.17 52.02,41.29 52.02,40.02 v51,39 | U2.17
  Bottom 0.254: J8.4 26,24.49 39.54,24.49 49.74,34.69 49.74,36.82 51,38.08 v51,39
UART2-TX  (via drill 0.35)
  Top 0.254: U2.16 51.88,39.19 v51.88,39 | U2.16
  Bottom 0.254: J8.3 27,23 38.59,23 50.13,34.53 50.13,36.66 51.88,38.42 v51.88,39
UART3-RX  (via drill 0.35)
  Top 0.254: 52.64,37.64 52.58,37.7 v52.42,37.7 49.95,37.7 U2.25 | U2.25
  Bottom 0.254: v52.42,37.7 52.42,36.33 63.44,25.3 64.41,25.3 71.62,18.09 71.62,14.63 73.54,12.72 73.54,11.19 SV1.4
UART3-TX  (via drill 0.3)
  Top 0.254: v58.75,34 56.5,36.25 48.5,36.25 47.38,37.38 U2.29
  Bottom 0.254: v58.75,34 62.25,34 64.25,32 U3.G20P
UART4-RX  (via drill 0.35)
  Top 0.254: v53,39 53,39.6 U2.15
  Bottom 0.254: J14.4 50.51,36.51 v53,39
UART4-TX  (via drill 0.35)
  Top 0.254: v53,38 | v53,38 52.98,37.98 | U2.14 54.35,40.24 54.35,39.35 v53,38 | U2.14
  Bottom 0.254: SV1.3 72,15.27 72,18.25 64.57,25.69 63.6,25.69 53,36.29 v53,38
UART5-RX
  Top 0.254: U5.1 27.15,18.09 27.55,17.7 31.36,17.7 33.05,19.39 33.05,21.91 36,24.85 53.65,24.85 56.64,27.84 56.64,29.59 U2.54
UART5-TX
  Top 0.254: U5.4 26.13,21.75 R17.2 31.34,21.75 34.82,25.23 53.49,25.23 56.26,28 56.26,29.27 U2.53
UART6-RX  (via drill 0.3)
  Top 0.254: v53.75,27.88 52.12,29.5 52,29.5 49.25,32.25 48.5,32.25 48.12,31.88 U2.38 | v71.25,10.12 71.25,9.38 74.12,6.5 J1.4
  Bottom 0.254: v53.75,27.88 53.75,27.62 v71.25,10.12
UART6-TX  (via drill 0.3)
  Top 0.254: v48,30.5 47.25,31.25 47.25,31.75 47.62,32.12 U2.37 | v74.25,8.12 91.25,8.12 92.88,6.5 J1.3
  Bottom 0.254: v48,30.5 48,30.25 49.48,28.77 49.48,17.61 45.27,13.39 45.27,7.86 47.98,5.16 51.06,5.16 52,6.09 52,11.38 52.53,11.91 68.09,11.91 71.88,8.12 v74.25,8.12
VCC
  Top 0.508: D4.A 13.01,9.04 J8.2 14.1,5.41 94.42,5.41 J1.2
  Top 1.016: D4.A 10.28,12.23 REG3.3 11.95,14.2 C18.1
VDD  (via drill 0.35)
  Top 0.508: C20.+ 24.8,8 33.08,8 CN1.2 | 6,14 5.92,14 REG3.1 | 5.95,13.97 REG3.1 | REG3.1 5.72,15.72 v6,16
  Top 1.016: D1.K 46.95,13.97 | 46.95,13.97 REG1.1 | D1.K 45,12 42,15 C13.+ C9.+ 36.27,17.53 36.27,11.19 CN1.2 | 54.95,13.97 D2.K 53.7,12 v52.85,11.15 52.21,10.52 49.89,10.52 48.4,12 D1.K | 54.95,13.97 REG2.1 | C8.1 56.12,13.97 54.95,13.97 | C17.1 48.12,13.97 46.95,13.97 | D4.K 5.95,13.97 | C19.1 6,14 | C20.+ v15,15
  Bottom 0.508: v6,16 7,15 v15,15
  Bottom 1.016: v52.85,11.15 53.35,11.15 J14.1

## Text on the board
Compartment: USB-R | USB-L | SWD-DEBUG | BOOT0 | RST | 5V | ESP32C3 | 3V3 | UART-USB | GYRO | ATMEGA-USB | ATMEGA | CPU | REG | TOUCH | FLOOR | BUZZER | RS485 | CAMERA | MOTOR CONNECTOR | CAMERA | 7.4V